# EAGLE board RJ11-shield (EAGLE 6.5.0)
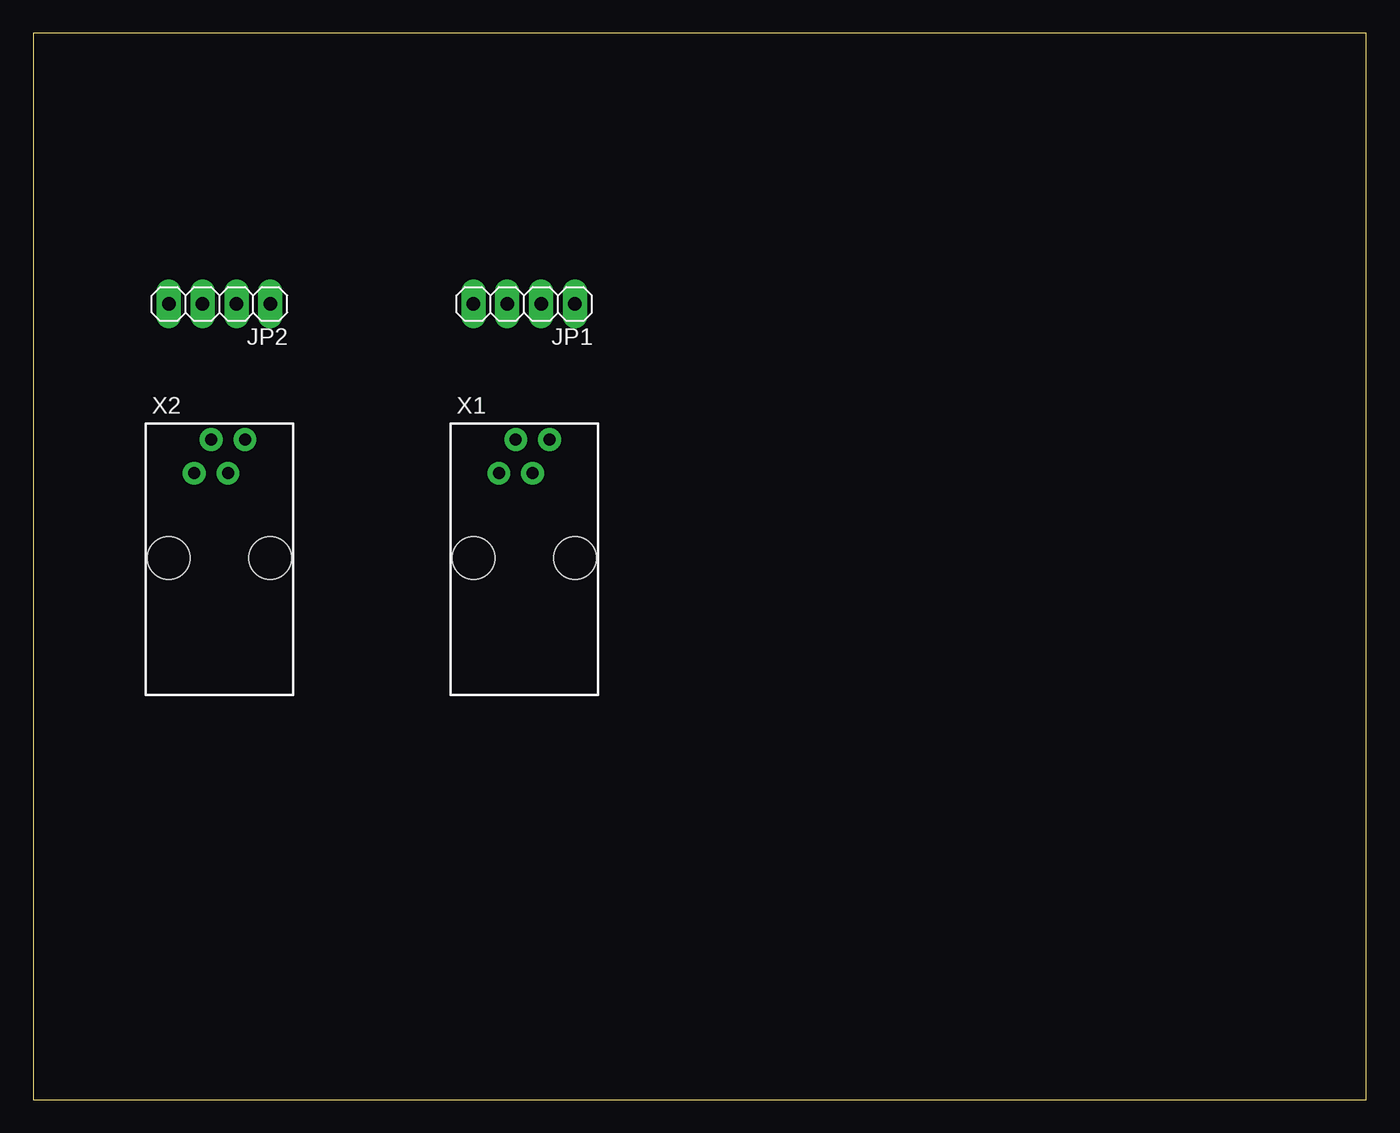
[diagram p0: board, top side]
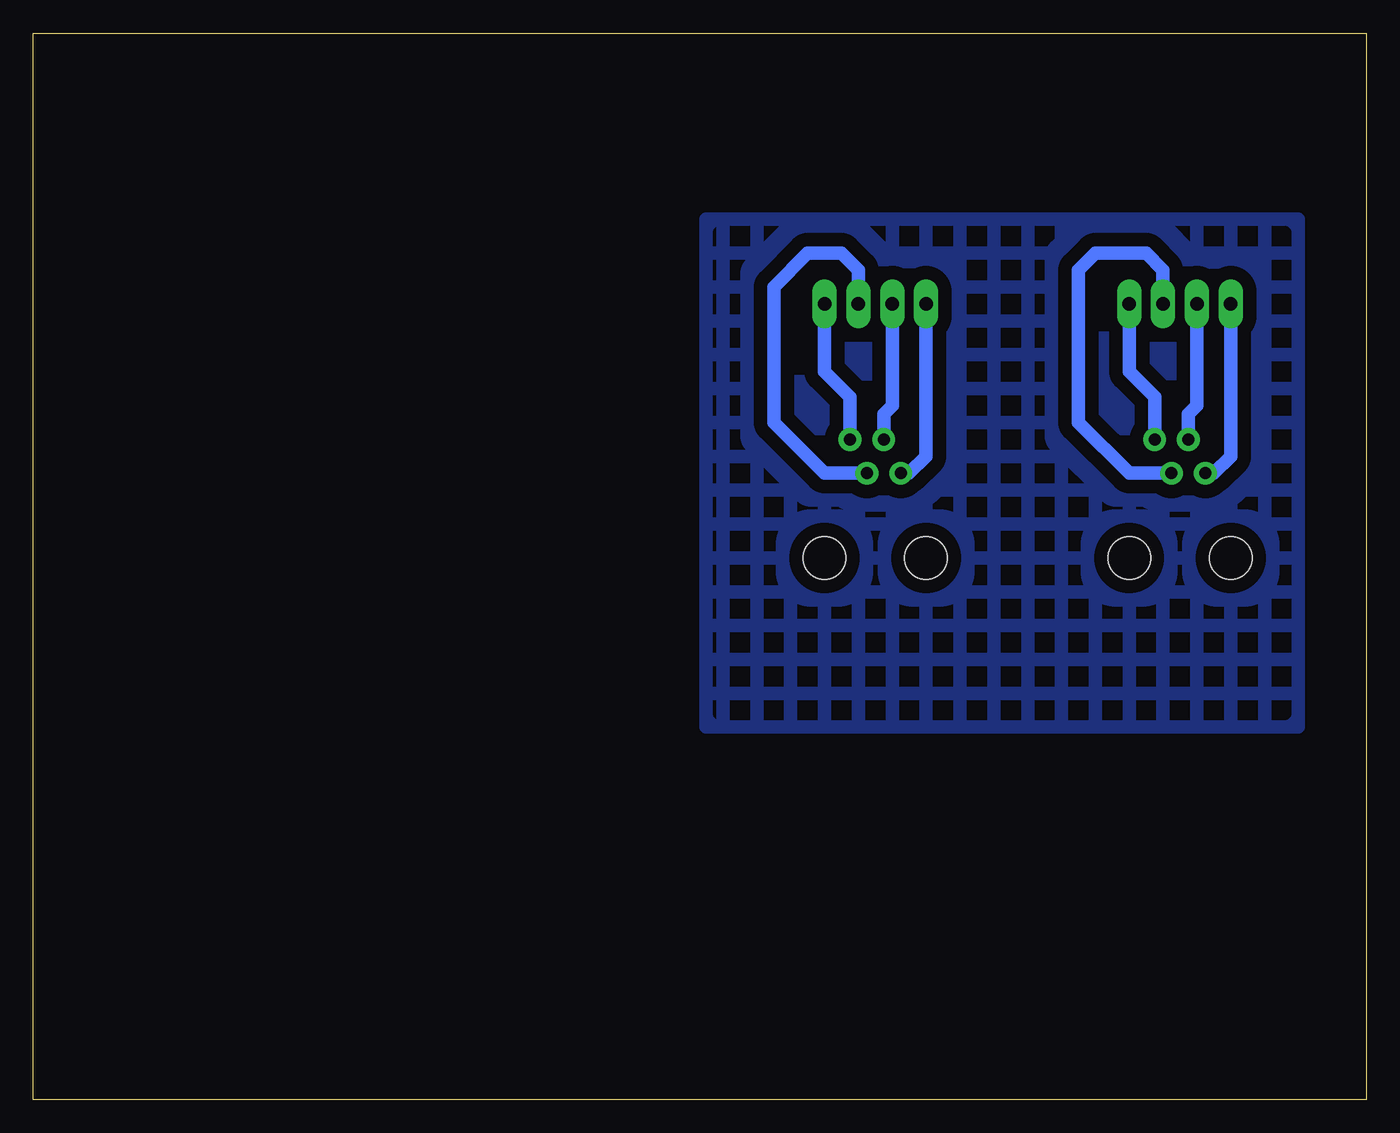
[diagram p1: board, bottom side, seen from below]

Size 100 x 80 mm. Coordinates in mm from the lower left corner, seen from the top.
Outline: 0,0 100,0 100,80 0,80 0,0
Copper layers (1*16): Top 0.035mm / dielectric 1.5mm / Bottom 0.035mm
Design rules "default": minimum track width 10mil, minimum drill 32mil, track to track 40mil, track to pad 40mil, pad to pad 40mil, via to via 40mil, smd to smd 12mil, copper to edge 40mil, drill to drill 40mil, minimum pad ring 16mil, minimum via ring 12mil, stop-mask expansion 4mil, vias tented up to drill 0mil, thermal gap 10mil

## Footprints (pad centres in the part's own frame; a part is rotated, then mirrored left to right if it is on the bottom)
1X04 = drill 1.016 long: 1 -3.81,0; 2 -1.27,0; 3 1.27,0; 4 3.81,0
14867 = drill 0.9 pad 1.422: 1 -1.905,6.35; 2 -0.635,8.89; 3 0.635,6.35; 4 1.905,8.89 | hole 3.2: -3.81,0; 3.81,0

## Placement (x,y rotation side)
JP1  [1X04]  36.83,59.69 180 top
JP2  [1X04]  13.97,59.69 180 top
X1  14867  [14867]  36.83,40.64 0 top
X2  14867  [14867]  13.97,40.64 0 top

## Library data of the parts
JP1 JP2 = pinhead
X1 X2 = con-4ucon; OC_FARNELL: unknown; OC_NEWARK: unknown

## Nets
N$1: JP1.4 X1.1
N$2: JP1.3 X1.2
N$3: JP1.2 X1.3
N$4: JP1.1 X1.4
N$5: JP2.4 X2.1
N$6: JP2.3 X2.2
N$7: JP2.2 X2.3
N$8: JP2.1 X2.4

## Tracks (layer width: path | path; a pad name or v marks a point on that pad's centre or on a via)
N$1
  Bottom 1.016: X1.1 34.29,46.99 33.02,48.26 JP1.4
N$2
  Bottom 1.016: X1.2 36.2,51.44 35.56,52.07 JP1.3
N$3
  Bottom 1.016: X1.3 40.64,46.99 44.45,50.8 44.45,60.96 41.91,63.5 39.37,63.5 38.1,62.23 JP1.2
N$4
  Bottom 1.016: X1.4 38.73,52.7 40.64,54.61 JP1.1
N$5
  Bottom 1.016: X2.1 11.43,46.99 10.16,48.26 JP2.4
N$6
  Bottom 1.016: X2.2 13.34,51.44 12.7,52.07 JP2.3
N$7
  Bottom 1.016: X2.3 17.78,46.99 21.59,50.8 21.59,62.23 20.32,63.5 16.51,63.5 15.24,62.23 JP2.2
N$8
  Bottom 1.016: X2.4 15.88,52.7 17.78,54.61 JP2.1
N$9
  pour Bottom (hatched): 5.08,66.04 5.08,27.94 49.53,27.94 49.53,29.21 49.53,66.04